# Altium PCB motor_driver.PcbDoc
Units mil, origin at the board's own origin, x right, y up, seen from the top; angles counter-clockwise.
Board outline 1770 x 2225 mil, 2 copper layers (Top Layer, Bottom Layer); 29 components, 17 nets, 107 pads, 63 vias.
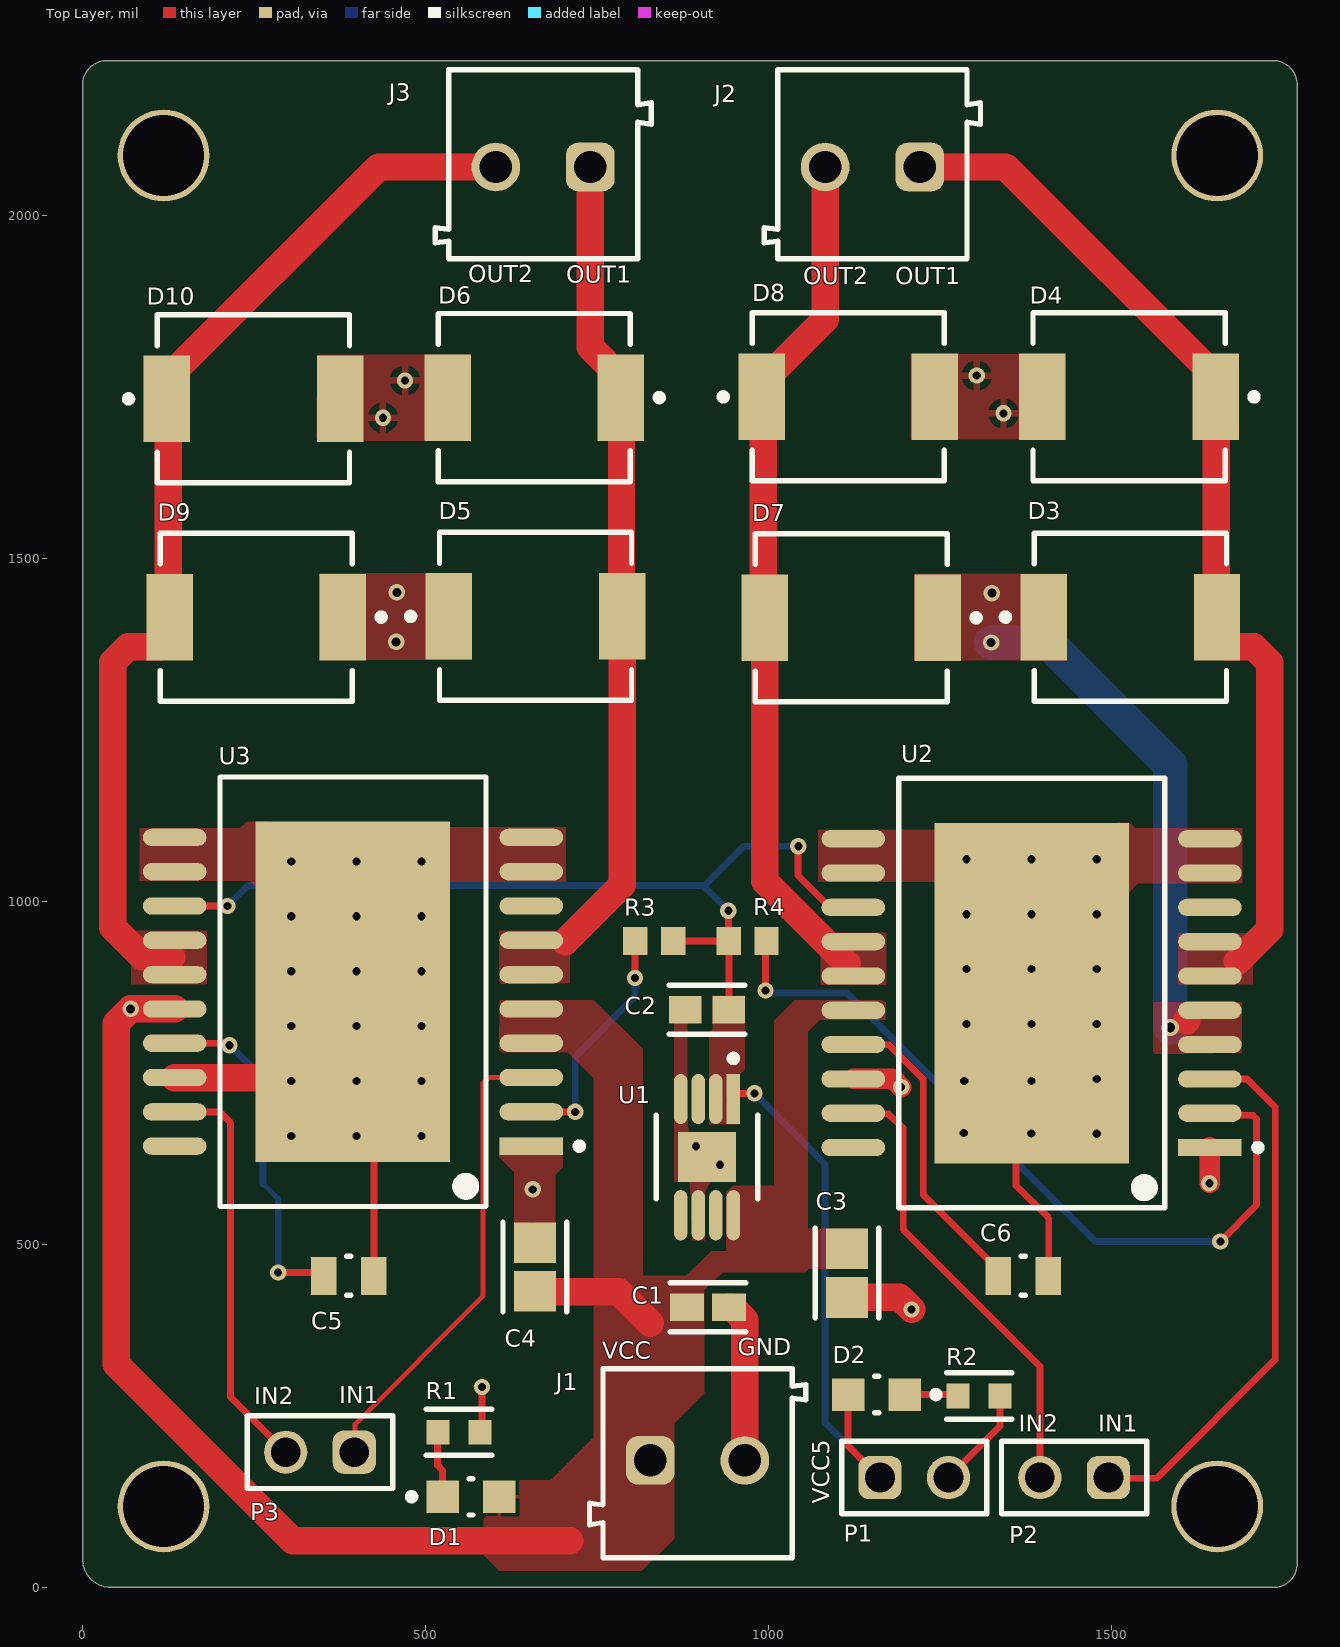
[diagram p0: Top Layer view]
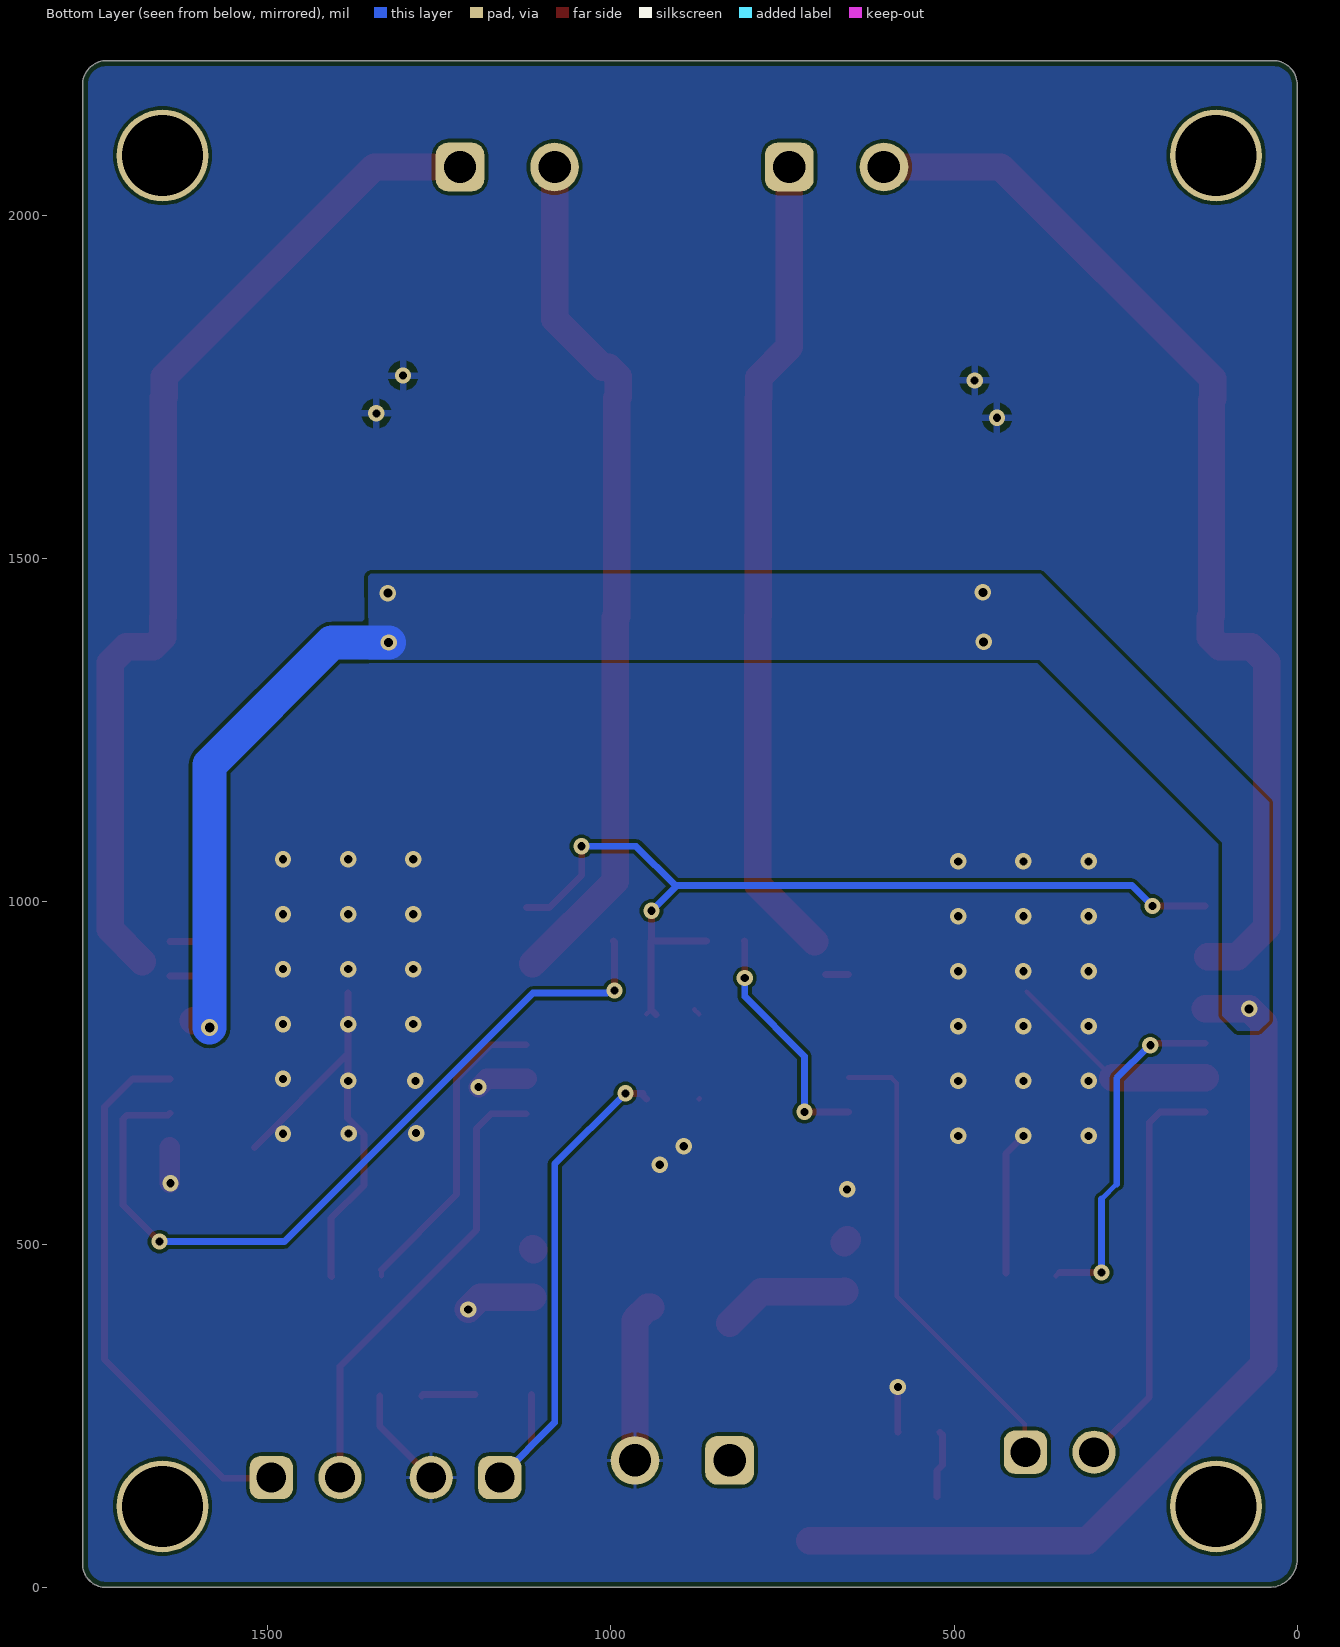
[diagram p1: Bottom Layer view, seen from below]

## Layer stack, top to bottom
Top Solder: solder mask 0.4, Solder Resist, Dk 3.5
Top Layer: signal copper 1.4
Dielectric 1: dielectric 12.6, FR-4, Dk 4.8
Bottom Layer: signal copper 1.4
Bottom Solder: solder mask 0.4, Solder Resist, Dk 3.5

## Board outline
0,41 ccw(c41,41) 41,0 1736,0 ccw(c1736,34) 1770,34 1770,2190 ccw(c1735,2190) 1735,2225 35,2225 ccw(c35,2190) 0,2190

## Design rules (kind name [scope] priority, off if disabled: settings)
BoardOutlineClearance [All] p1: gap=7.87 ignorepadtopadclearanceinfootprint=FALSE
Clearance [All] p1: gap=5 ignorepadtopadclearanceinfootprint=FALSE except(9.84: Arc-Hole Track-Hole SMDPad-Hole THPad-Hole Via-Hole Fill-Hole Poly-Hole Region-Hole Text-Hole)
ComponentClearance [All] p1: gap=5 collisioncheckmode=3 verticalgap=5 showdistances=TRUE
DiffPairsRouting [All] p1: maxlimit=10 minlimit=5 mostfreqgap=5 toplayer_minwidth=5 toplayer_maxwidth=1000 toplayer_prefwidth=5 bottomlayer_minwidth=5 bottomlayer_maxwidth=1000 bottomlayer_prefwidth=5 maxuncoupledlength=500
Height [All] p1: minheight=0 maxheight=71497.94 prefheight=500
HoleSize [All] p1: absolutevalues=TRUE maxlimit=248.03 minlimit=11.81 maxpercent=80.000 minpercent=20.000
HoleToHoleClearance [All] p1: gap=9.84 allowstackedmicrovias=FALSE
MinimumAnnularRing [All] p1: minimumring=3
MinimumSolderMaskSliver [All] p1: minsoldermaskwidth=0
PlaneClearance [All] p1: clearance=5
PlaneConnect PlaneConnectPowerPads [InPadClass('PowerPads')] p1: planeconnectstyle=Direct reliefexpansion=20 reliefentries=4 reliefconductorwidth=10 reliefairgap=10
PlaneConnect [All] p2: pad.planeconnectstyle=Relief pad.reliefexpansion=11.81 pad.reliefentries=4 pad.reliefconductorwidth=5 pad.reliefairgap=5 via.planeconnectstyle=Direct via.reliefexpansion=11.81 via.reliefentries=4 via.reliefconductorwidth=5 via.reliefairgap=5
PolygonConnect PolygonConnectPowerPads [All vs (InPadClass('PowerPads'))] p1: connectstyle=Direct reliefconductorwidth=10 reliefentries=4 polygonreliefangle="90 Angle" airgapwidth=10
PolygonConnect [All] p2: thpad.connectstyle=Relief thpad.reliefconductorwidth=5 thpad.reliefentries=4 thpad.polygonreliefangle="90 Angle" thpad.airgapwidth=5 smdpad.connectstyle=Relief smdpad.reliefconductorwidth=5 smdpad.reliefentries=4 smdpad.polygonreliefangle="90 Angle" smdpad.airgapwidth=5 via.connectstyle=Direct via.reliefconductorwidth=5 via.reliefentries=4 via.polygonreliefangle="90 Angle" via.airgapwidth=5
RoutingVias [All] p1: holewidth=11.81 width=23.62 viastyle="Through Hole" minholewidth=11.81 minwidth=23.62 maxholewidth=23.62 maxwidth=259.84
SilkToSilkClearance [All] p1: silktosilkclearance=0
SilkToSolderMaskClearance [IsPad] p1: minsilkscreentomaskgap=5 clearancetoexposedcopper=TRUE
SolderMaskExpansion [All] p1: expansion=2.95 istentingtop=FALSE
Width [All] p1: maxlimit=1000 minlimit=5 preferedwidth=5 minimp=50.000000 maximp=50.000000 favimp=50.000000
20 further rules are at their usual default settings.

## Classes and differential pairs
component class motor_driver: C1 C2 C3 C4 C5 C6 D7 D9 D10 J1 J2 J3 P1 P2 P3 R1 R2 R3 R4 U1 U2 U3

## Components (designator, comment, footprint, x,y, rotation, side; value= is the part's Value field where it differs from the comment)
C1 "1uF" FP-CC0603-DA-IPC_A 911.41,408 r0 top value="100 nF"
C2 "10uF" FP-GRM188-0_1-e0_2_0_55-IPC_A 910,842 r180 top
C3 "47pF" FP-C0805C-DN-IPC_A 1114,458 r270 top value="47 pF"
C4 "47pF" FP-C0805C-DN-IPC_A 659,467 r90 top value="47 pF"
C5 "33nF" FP-CC0805-0_85-MFG 388,454 r0 top value="33 nF"
C6 "33nF" FP-CC0805-0_85-MFG 1371,454 r0 top value="33 nF"
D1 "HSMH-C170" FP-HSMS-C170-MFG 566,132 r0 top
D2 "HSMH-C170" FP-HSMS-C170-MFG 1157,281 r180 top
D3 "SS34-E3/9AT" FP-SMC-MFG 1527,1414 r0 top
D4 "SS34-E3/9AT" FP-SMC-MFG 1525,1735 r180 top
D5 "SS34-E3/9AT" FP-SMC-MFG 660,1415 r0 top
D6 "SS34-E3/9AT" FP-SMC-MFG 658.32,1734 r180 top
D7 "SS34-E3/9AT" FP-SMC-MFG 1120,1413 r180 top
D8 "SS34-E3/9AT" FP-SMC-MFG 1115.68,1735 r0 top
D9 "SS34-E3/9AT" FP-SMC-MFG 253,1414 r180 top
D10 "SS34-E3/9AT" FP-SMC-MFG 249,1732 r0 top
J1 "POWER" 691103110002 50896.1,50181.06 r0 top
J2 "MOTOR_A" 691103110002 -48848.9,-47926.06 r180 top
J3 "MOTOR_B" 691103110002 -49328.9,-47926.06 r180 top
P1 "61300211121" 61300211121 1212,160 r0 top
P2 "61300211121" 61300211121 1445,160 r180 top
P3 "61300211121" 61300211121 346,197 r180 top
R1 "1k" FP-RC0603-0_55-IPC_B 548.52,226 r0 top
R2 "1k" FP-RC0603-0_55-IPC_B 1306.42,279 r0 top
R3 "10k" RESC1609X50X30ML8T20 833,942 r180 top
R4 "10k" RESC1609X50X30ML8T20 969,942 r0 top
U1 "TLV76750DGNR" FP-DGN0008G-IPC_A 910,627 r270 top
U2 "MC33886VW" FP-SOT397-2-IPC_A 1383,866 r180 top
U3 "MC33886VW" FP-SOT397-2-IPC_A 394,868 r180 top

## Footprints (in the part's own frame and the unit in brackets; to place one, negate y for a bottom-side part, rotate by r counter-clockwise, add the part's x,y. Pads: shape width x height; smd on the part's side, far side on the other; paste and mask are expansions set on the pad)
61300211121 [mm] "Pin Header, pitch 2.54 mm, THT, Vertical, single row, 2p"
  rrect50% 1.6x1.6 hole 1.1: 1(-1.27,0)
  round 1.6 hole 1.1: 2(1.27,0)
  silkscreen extent -2.69,-1.35 2.69,1.35, body extent -2.54,-1.27 2.54,1.27, height 8.57
691103110002 [mm] "3,50mm - modular - blue - Horizontal wire entry - Pressure clamp - 8,4mm height - 02p"
  rrect50% 1.8x1.8 hole 1.2: 1(-1271.75,-1269.9)
  round 1.8 hole 1.2: 2(-1268.25,-1269.9)
  silkscreen extent -1274,-1273.5 -1266,-1266.5, body extent -1274,-1273.5 -1266,-1266.5, height 8.45
FP-C0805C-DN-IPC_A [mil]
  rect 59.24x61.27 smd paste+0 mask+0: 1(-35.46,0) 2(35.46,0)
  silkscreen extent -65,-46 65,46, body extent -85,-50 85,50, height 10
FP-CC0603-DA-IPC_A [mil]
  rect 49.53x39.85 smd paste+0 mask+0: 1(-30.59,0) 2(30.59,0)
  silkscreen extent -55,-36 55,36, body extent -75,-40 75,40, height 10
FP-CC0805-0_85-MFG [mm]
  rect 0.95x1.4 smd paste+0 mask+0: 1(-0.925,0) 2(0.925,0)
  silkscreen extent -0.08,-0.72 0.08,0.72, body extent -1.6,-1.05 1.6,1.05, height 0.25
FP-DGN0008G-IPC_A [mm]
  rect 1.857x0.498 smd paste+0 mask+0: 1(-2.151,0.975)
  rrect100% 1.857x0.498 smd paste+0 mask+0: 2(-2.151,0.325) 3(-2.151,-0.325) 4(-2.151,-0.975) 5(2.151,-0.975) 6(2.151,-0.325) 7(2.151,0.325) 8(2.151,0.975)
  rect 1.846x2.15 smd paste-1000 mask+0: 9(0,0)
  silkscreen extent -3.78,-1.88 1.55,1.88, body extent -3.58,-2 3.58,2, height 0.25
FP-GRM188-0_1-e0_2_0_55-IPC_A [mil]
  rect 47.57x39.85 smd paste+0 mask+0: 1(-31.57,0) 2(31.57,0)
  silkscreen extent -55,-36 55,36, body extent -75,-40 75,40, height 10
FP-HSMS-C170-MFG [mm]
  rect 1.2x1.2 smd paste+0 mask+0: 1(-1.05,0) 2(1.05,0)
  silkscreen extent -2.32,-0.67 0.08,0.67
FP-RC0603-0_55-IPC_B [mil]
  rect 33.81x35.91 smd paste+0 mask+0: 1(-30.58,0) 2(30.58,0)
  silkscreen extent -47,-34 47,34, body extent -57,-28 57,28, height 10
FP-SMC-MFG [mm]
  rect 1.72x3.2 smd paste+0 mask+0: 1(-3.205,0) 2(3.205,0)
  silkscreen extent -4.75,-3.11 3.56,3.11, body extent -4.17,-3.21 4.17,3.21, height 0.25
FP-SOT397-2-IPC_A [mm]
  rect 2.354x0.639 smd paste+0 mask+0: 1(-6.6,5.715)
  rrect100% 2.354x0.639 smd paste+0 mask+0: 2(-6.6,4.445) 3(-6.6,3.175) 4(-6.6,1.905) 5(-6.6,0.635) 6(-6.6,-0.635) 7(-6.6,-1.905) 8(-6.6,-3.175) 9(-6.6,-4.445) 10(-6.6,-5.715) 11(6.6,-5.715) 12(6.6,-4.445) 13(6.6,-3.175) 14(6.6,-1.905) 15(6.6,-0.635) 16(6.6,0.635) 17(6.6,1.905) 18(6.6,3.175) 19(6.6,4.445) 20(6.6,5.715)
  rect 7.2x12.6 smd paste-1000 mask+0: 21(0,0)
  silkscreen extent -8.5,-7.95 4.92,7.95, body extent -8.28,-8.45 8.28,8.45, height 0.25
RESC1609X50X30ML8T20 [mm] "Chip Resistor, 2-Leads, Body 1.65x0.95mm, IPC Low Density"
  rect 0.9x1.05 smd: 1(-0.7,0) 2(0.7,0)
  body extent -0.82,-0.48 0.82,0.48, height 0.5

## Part data
C1: library part CMP-2000-05002-2, "CAP CER 0.1UF 16V X7R 0603", Capacitance="100 nF", Manufacturer=YAGEO, Manufacturer Part Number=CC0603KRX7R7BB104, Package=CC0603-DA, Temperature="-55°C to +125°C", Temperature Characteristic=X7R, Temperature Coefficient=15%, Temperature Range High=+125°C, Temperature Range Low=-55°C, Tolerance=0.1, Voltage="16 V", Automotive=No, Category=Cap, ComponentLink2Description=Datasheet, ComponentLink2URL=http://www.yageo.com/documents/recent/UPY-GPHC_X7R_6.3V-to-50V_18.pdf, Device Class L1="Passive Components", Device Class L2=Capacitors, Device Class L3="Ceramic Capacitors", Digikey Description="CAP CER 0.1UF 16V X7R 0603", Footprint Url=http://www.yageo.com/exep/pages/download/literatures/UPY-C_GEN_24.pdf, Height=0.9mm, Lead Free=Yes, Material=Ceramic, Mouser Description="Multilayer Ceramic Capacitor, CC Series, 0.1 - F, - 10%, X7R, 16 V, 0603 [1608 Metric]", Octopart=https://octopart.com/cc0603krx7r7bb104-yageo-192941, RoHS=TRUE, Voltage Rating="16 V"
C2: library part CMP-2006-02792-2, "Chip Multilayer Ceramic Capacitors for General Purpose, 0603, 10uF, X5R, 15%, 20%, 6.3V", Case Code (Imperial)=0603, Case Code (Metric)=1608, Dielectric=X5R, Max Operating Temperature=85°C, Min Operating Temperature=-55°C, Package Quantity=4000, Tolerance=20%, Voltage=6.3V, Capacitance=10uF, Case/Package=0603, Depth=0.8mm, Height=0.8mm, Lead Free="Lead Free", Length=1.6mm, Material=Ceramic, Mount="Surface Mount", Packaging="Tape and Reel", Radiation Hardening=No, REACH SVHC="No SVHC", Termination=SMD/SMT, Thickness=0.035inch, Voltage Rating=6.3V, Voltage Rating (DC)=6.3V, Width=0.031inch
C3 C4: library part CMP-1036-01631-3, "CAP CER 47PF 100V 5% NP0 0805", Capacitance="47 pF", Manufacturer=KEMET, Manufacturer Part Number=C0805C470J1GACTU, Package=C0805C-DN, Temperature="-55°C to +125°C", Temperature Characteristic=C0G, Temperature Coefficient=30ppm/°C, Temperature Range High=+125°C, Temperature Range Low=-55°C, Tolerance=0.05, Voltage Rating="100 V", Automotive=No, Category=Cap, ComponentLink2Description=Datasheet, ComponentLink2URL=https://content.kemet.com/datasheets/KEM_C1003_C0G_SMD.pdf, Device Class L1="Passive Components", Device Class L2=Capacitors, Device Class L3="Ceramic Capacitors", Digikey Description="CAP CER 47PF 100V 5% NP0 0805", Height=0.88mm, Ipc Land Pattern Name=CAPC200125X78, Lead Free=Yes, Material=Ceramic, Mouser Description="Capacitor: ceramic; MLCC; 47pF; 100V; C0G; ±5%; SMD; 0805", Octopart=https://octopart.com/c0805c470j1gactu-kemet-9138638, RoHS=TRUE
C5 C6: library part CMP-03422-000605-1, "CAP CER 0.033UF 25V X7R 0805", Capacitance="33 nF", Manufacturer=Yageo, Manufacturer Part Number=CC0805KRX7R8BB333, Package=CC0805-0.85, Temperature="-30°C to +85°C", Temperature Characteristic=X7R, Temperature Range High=+85°C, Temperature Range Low=-30°C, Tolerance=0.1, Voltage Rating="25 V", Automotive=No, Category=Cap, ComponentLink2Description=Datasheet, ComponentLink2URL=http://www.yageo.com/documents/recent/UPY-GPHC_Y5V_6.3V-to-50V_8.pdf, Device Class L1="Passive Components", Device Class L2=Capacitors, Device Class L3="Ceramic Capacitors", Digikey Description="CAP CER 0.033UF 25V X7R 0805", Footprint Url=http://www.yageo.com/exep/pages/download/literatures/UPY-C_GEN_24.pdf, Height=0.95mm, Ipc Land Pattern Name=CAPC200125X85, Lead Free=Yes, Material=Ceramic, Mouser Description="Multilayer Ceramic Capacitors MLCC - SMD/SMT 33nF 25V X7R 10%", Octopart=https://octopart.com/cc0805krx7r8bb333-yageo-42623524, RoHS=TRUE
D1 D2: library part CMP-18399-000018-1, "LED RED DIFFUSED CHIP SMD", Case Code (Imperial)=0805, Case Code (Metric)=2012, Color=Red, Forward Current=20mA, Forward Voltage=2.1V, Lens Color=White, Max Operating Temperature=85°C, Min Operating Temperature=-40°C, Package Quantity=1, Power Dissipation=52mW, Reverse Voltage=5V, Case/Package=0805, Depth=1.25mm, Dominant Wavelength=626nm, Height=0.8mm, Illumination Color=Red, Lead Free="Lead Free", Length=2mm, Lens Style=Diffused, Lens Transparency=Diffused, Luminous Intensity=10mcd, Mount="Surface Mount", Number of Elements=1, Number of LEDs=1, Number of Pins=2, Number of Terminals=2, Packaging="Tape and Reel", Power Rating=52mW, Radiation Hardening=No, REACH SVHC="No SVHC", Shape=Rectangular, Test Current=20mA, Viewing Angle=170°, Wavelength=626nm, Width=1.25mm
D3 D4 D5 D6 D7 D8 D9 D10: library part CMP-02539-000066-1, "DIODE SCHOTTKY 40V 3A DO214AB", Average Rectified Current=3A, Case/Package=SMC, Forward Voltage=500mV, Max Operating Temperature=125°C, Max Repetitive Reverse Voltage (Vrrm)=40V, Max Reverse Current=500uA, Max Surge Current=100A, Min Operating Temperature=-55°C, Package Quantity=3500, Element Configuration=Single, Forward Current=3A, Max Reverse Leakage Current=500uA, Max Reverse Voltage (DC)=40V, Mount="Surface Mount", Number of Pins=2, Packaging="Tape and Reel", Peak Non-Repetitive Surge Current=100A, Radiation Hardening=No, RoHS Compliant=Yes, Series=-
J1 J2 J3: library part CMP-1502-03254-2, Color=Blue, Current=10A, Max Operating Temperature=105°C, Min Operating Temperature=-40°C, Voltage=125V, Contact Material="Brass, Copper, Nickel, Tin, Zinc", Contact Plating=Tin, Current Rating=10A, Height=8.5mm, Housing Material=Nylon, Lead Pitch=3.5mm, Length=7mm, Mount="Through Hole", NexarPartId=18818286, Number of Contacts=2, Number of Levels=1, Number of Pins=2, Number of Positions Per Level=2, Number of Rows=1, Packaging=Box, Pitch=3.5052mm, Plating=Steel, REACH SVHC=Unknown, RoHS=Compliant, Stripping Length=-6mm, Termination=Screw, Voltage Rating=125V, Width=8mm, Wire Gauge (Max)=26AWG, Wire Gauge (Min)=16AWG, Wire/Cable Gauge=26AWG
P1 P2 P3: library part CMP-1712-00002-5, Color=Black, Contact Resistance=20mΩ, Current Rating=3A, Max Operating Temperature=125°C, Min Operating Temperature=-40°C, Operating Supply Voltage=250V, Connector Type="Male Pin", Contact Gender=Male, Contact Material=Copper, Contact Mating Length=5.9944mm, Contact Plating=Gold, Gender=Male, Height=8.94mm, Housing Material=PBT, Lead Free="Lead Free", Lead Pitch=2.54mm, Mount="Through Hole", NexarPartId=20081794, Number of Contacts=2, Number of Pins=2, Number of Positions=2, Number of Rows=1, Orientation=Vertical, Packaging=Bulk, Pitch=2.54mm, REACH SVHC="No SVHC", RoHS=Compliant, Termination="Through Hole", Voltage Rating=250V
R1 R2: library part CMP-1659-00009-5, "RES 1K OHM 1% 1/10W 0603", Case Code (Imperial)=0603, Case Code (Metric)=1608, Max Operating Temperature=155°C, Max Power Dissipation=100mW, Min Operating Temperature=-55°C, Resistance=1kR, Resistance Tolerance=1%, Resistor Type="Thick Film", Temperature Coefficient=100ppm/°C, Voltage Rating=50V, Case/Package=0603, Construction=Rectangular, Contact Plating=Tin, Depth=0.8mm, Features="Moisture Resistant", Height=0.45mm, Lead Free="Lead Free", Length=1.6mm, Military Standard=Not, Number of Terminations=2, Packaging="Tape and Reel", Power Rating=100mW, Radiation Hardening=No, REACH SVHC="No SVHC", RoHS Compliant=Yes, Series=RC, Size Code=0603, Technology="THICK FILM", Termination=SMD/SMT, Tolerance=1%
R3 R4: library part CMP-1666-00005-4, "Chip Resistor, 10 KOhm, +/- 1%, 100 mW, -55 to 155 degC, 0603 (1608 Metric), RoHS, Tape and Reel", Manufacturer="Vishay Semiconductor", Max Operating Temperature="155 degC", Min Operating Temperature="-55 degC", Package Quantity=5000, Voltage Rating="75 V", ComponentLink1Description="Manufacturer URL", ComponentLink1URL=http://www.vishay.com/, ComponentLink2Description=Datasheet, ComponentLink2URL=https://datasheet.ciiva.com/11809/0900766b80d98afc-11809037.pdf, DatasheetVersion=06/2012, Height="0.45 mm", Length="1.55 mm", Mounting Technology="Surface Mount", PackageDescription="2-Pin Surface Mount Device, Body 1.575 x 0.85 mm", PackageReference=0603, Packaging="Tape and Reel", REACH SVHC=Unknown, RoHSCompliant=true
U1: library part CMP-00370-110083557-1, "TLV76701DGNR Adjustable- and fixed-output, 1-A, 16-V, positive-voltage low-dropout (LDO) linear regulator 8-HVSSOP -40 to 125", Dropout Voltage=900mV, Manufacturer Lifecycle Status=ACTIVE, Max Junction Temperature (Tj)=125°C, Max Supply Voltage=16V, Min Operating Temperature=-40°C, Min Supply Voltage=2.5V, Nominal Supply Current=1.5mA, Output Current=1A, Accuracy=0.5%, Height=1.1mm, Length=3mm, Lifecycle Status=Production, Max Operating Temperature=125°C, NexarPartId=110083557, Number of Channels=1, Number of Outputs=1, Number of Pins=8, Thickness=1.02mm, Width=3mm
U2 U3: library part CMP-10141-000005-1, "Motor Driver CMOS Parallel 20-HSOP", Case/Package=HSOP, Max Input Voltage=7V, Max Operating Temperature=125°C, Max Output Current=5A, Max Supply Voltage=40V, Min Operating Temperature=-40°C, Min Supply Voltage=5V, Nominal Supply Current=20mA, Package Quantity=30, Interface=Parallel, Logic Function="AND GATE", Mount="Surface Mount", Number of Outputs=2, Number of Pins=20, Output Current=5A, Output Voltage=40V, Packaging=Rail/Tube, REACH SVHC="No SVHC", RoHS Compliant=Yes, Series=-, Supply Current=20mA, Technology=CMOS, Termination=SMD/SMT, Weight=0.078135oz

## Free pads (board coordinates)
  round 133.86 hole 118.11: 2(118.11,2086.61) 3(1653.54,2086.61) 4(118.11,118.11) 5(1653.54,118.11)

## Via types
v1: diameter 24, hole 12, Top Layer to Bottom Layer, 38 vias
v2: diameter 23.62, hole 11.81, Top Layer to Bottom Layer, 18 vias
v3: diameter 24, hole 13, Top Layer to Bottom Layer, 5 vias
v4: diameter 25, hole 14, Top Layer to Bottom Layer, 1 vias
v5: diameter 24.02, hole 12, Top Layer to Bottom Layer, 1 vias

## Nets (pads, with @x,y where several pads share a name; then routed paths per layer and width w, separated by ;. In a path a pad name is that pad's centre, name@x,y a point inside that pad or via, vN(x,y) a via of type N, cw(c..) or ccw(c..) an arc to the next point about the centre after c; other vN are vias at no path point)
GND: C1.2 C2.2 C3.2 C4.2 C5.2 C6.2 D4.2 D6.2 D8.2 D10.2 J1.2 P1.2 R1.2 R2.2 U1.4 U1.6 U1.9 U2.1 U2.9 U2.10 U2.11 U2.12 U2.18 U2.21 U3.1 U3.9 U3.10 U3.11 U3.12 U3.18 U3.21 | length 1857.7
  Top Layer w7: U3.21@269,743 U3.21 ; U1.4@871,712.29 U1.4 ; C2.2@871.61,835.18 C2.2
  Top Layer w10: v1(399,658) 424.46,632.54 C5.2@424.46,458 ; R1.2@581.53,226 582,226.47 v2(582,292) ; P1.2 1337,235 R2.2 ; U2.21 1383,823 1386,820 1383,817 U2.21@1383,777.73 ; C6.2@1407,453 1408,454 1408,538 1360,586 1360,660 1384,684 1384,748 1383,749 U2.21@1383,777.73 ; U2.21@1519.73,641 U2.21@1383,777.73 ; v2(1642,589) v2@1642.85,589.85
  Top Layer w30: U2.18 1180.9,741 v2(1192.89,729.01) ; v2@1642.85,589.85 U2.1
  Top Layer w40: U3.18 U3.21@269,743 ; C4.2@656,506.48 C4.2@660.02,502.46 ; C1.2 946.69,408 965,389.69 J1.2 ; C3.2 1190.46,422.54 v2(1208,405)
  other v1: 656,580 929,616 894,643 304,658 494,658 1382.44,661.44 1478,661 1284,662 304,738 399,738 494,738 1285,738 1383,738 1478,741 304,818 399,818 494,818 1383,821.01 1478,821 304,898 399,898 494,898 1288,901 1383,901 1478,901 304,978 399,978 494,978 1288,981 1383,981 1478,981 304,1058 399,1058 494,1058 1288,1061 1383,1061 1478,1061
  other v2: 437.65,1704.51 1342,1711 470,1759 1303,1766
  other v5: 1288,821
NetC5_1: C5.1 U3.17 | length 510.7
  Top Layer w7: C5.1@346.58,459 C5.1
  Top Layer w10: U3.17 211,793 v2(214,790) ; v2(285,459) C5.1@346.58,459
  Bottom Layer w7: v2(214,790) v2@215,790 ; 263,588 285,566
  Bottom Layer w10: v2@215,790 263,742 263,588 ; v2(285,459) 285,566
NetC6_1: C6.1 U2.17 | length 455
  Top Layer w7: U2.17 U2.17@1123.43,790.72 ; C6.1 C6.1@1334.58,462.86
  Top Layer w10: U2.17@1123.43,790.72 1175.28,790.72 1225,741 1225,572.44 C6.1@1334.58,462.86
NetD1_1: D1.1 R1.1 | length 98.6
  Top Layer w10: R1.1@520.38,226 517,222.62 517,178 524.66,170.34 D1.1
NetD2_1: D2.1 R2.1 | length 78.3
  Top Layer w10: D2.1 1273.84,281 R2.1
NetD3_2: D3.2 D4.1 J2.1 U2.6 U2.7 | length 1552.8
  Top Layer w10: U2.6@1609.09,891 U2.6 ; U2.7@1609.09,941 U2.7
  Top Layer w40: J2.1 1345.31,2070 1651.18,1764.13 D4.1 1652.18,1734 1652.18,1415 D3.2 1653.18,1384.87 1667.04,1371.01 1706.57,1371.01 1730,1347.58 1730,959 1683,912
NetD5_2: D5.2 D6.1 J3.1 U3.6 U3.7 | length 1216.2
  Top Layer w10: U3.6 U3.6@687.62,893
  Top Layer w40: 703.1,941.1 786.18,1024.18 D5.2 785.34,1415.84 785.34,1733.16 D6.1 784.5,1763.13 740,1807.64 J3.1
NetD7_2: D7.2 D8.1 J2.2 U2.14 U2.15 | length 1256.6
  Top Layer w40: J2.2 1082.2,1848.2 1011.99,1777.99 1003.35,1777.99 989.49,1764.13 D8.1 991.66,1732.84 991.66,1415.16 D7.2 993.82,1029.18 1114.41,908.59
NetD9_2: D9.2 D10.1 J3.2 U3.14 U3.15 | length 1573.3
  Top Layer w40: 130,919 87,919 44,962 44,1348.25 66.76,1371.01 112.96,1371.01 126.82,1384.87 D9.2 124.82,1416 124.82,1730 D10.1 122.82,1761.13 431.68,2070 J3.2
NetP2_1: P2.1 U2.3 | length 794.8
  Top Layer w10: P2.1@1495,159 1565,159 1738,332 1738,700 1697,741 U2.3
NetP2_2: P2.2 U2.19 | length 692.4
  Top Layer w7: U2.19 U2.19@1123.93,690.22
  Top Layer w10: U2.19@1123.93,690.22 1174.78,690.22 1196,669 1196,521.17 1395,322.17 P2.2
  Bottom Layer w10: P2.2 P2.2@1395,179
NetP3_1: P3.1 U3.3 | length 689
  Top Layer w7: P3.1@397,197 397,238 583.41,424.41 583.41,735 591.41,743 U3.3
NetP3_2: P3.2 U3.19 | length 602.3
  Top Layer w10: U3.19@134.65,692.5 U3.19 200,693 215.5,677.5 215.5,277.5 P3.2
NetR3_2: R3.2 U3.2 | length 349.4
  Top Layer w10: U3.2 v2(718,693) ; v2(805,888) 805,941.56 R3.2
  Bottom Layer w10: v2(718,693) 718,774 805,861 v2(805,888)
NetR4_2: R4.2 U2.2 | length 1159.2
  Top Layer w10: v2(995,870) 995,940.44 R4.2 ; U2.2 1645.75,688.1 1705.14,688.1 1711,682.24 1711,557 v2(1658,504)
  Bottom Layer w10: v2(995,870) 997.61,867.39 1004.29,867.39 1005.69,866 1114,866 1476,504 v2(1658,504)
VCC: C1.1 C3.1 C4.1 D1.2 D3.1 D5.1 D7.1 D9.1 J1.1 U1.8 U2.4 U2.5 U2.16 U3.4 U3.5 U3.16 | length 2265.7
  Top Layer w40: U3.16 v3(70,843) 49,822 49,325 306,68 710.2,68 ; C4.1 659.54,431 781,431 827.2,384.8 ; C3.1@1112.72,492.18 C3.1 ; 1609.09,826.09 1609.09,826.17
  Bottom Layer w50: v3(1324,1377) 1407,1377 1585,1199 v4(1585,816)
  other v3: 457,1378 1325,1449 458,1450
VCC5: C2.1 D2.2 P1.1 R3.1 R4.1 U1.1 U1.2 U2.13 U3.13 | length 2196.6
  Top Layer w7: C2.1 C2.1@948.39,835.18
  Top Layer w10: U3.13 v2(211,993) ; R3.1 R4.1 ; C2.1@934,834.43 C2.1 941.85,842.28 941.85,942 R4.1 ; v2(941,986) 941,942.44 R4.1 ; U1.1 953.19,716.48 953.19,720 v2(979,720) ; v2(1043,1080) 1042.61,1079.61 1042.61,1037.78 1089.38,991 U2.13 ; D2.2 1115.66,206.34 P1.1
  Bottom Layer w10: v2(211,993) 240.89,1022.89 906.14,1022.89 ; v2(941,986) 906.14,1020.86 906.14,1022.89 ; v2(979,720) 1082,617 1082,240 P1.1 ; v2(1043,1080) 963.26,1080 906.14,1022.89
pads on no net: U1.3 U1.5 U1.7 U2.8 U2.20 U3.8 U3.20

## Polygon pours and split planes (outlines as drawn)
VCC on Top Layer "Top Layer-VCC" (solid, pour order 36): 933.13,459 1053,459 1057,463 1057,464 1144,464 1144,523 1057,523 1057,810 1074,827 1170.5,827 1170.5,856 1167,856 1038,856 1008,826 1008,585 948,585 938,575 938,490 916,490 880,454 816,454 816,785 745,856 608,856 606.97,780 707,780 745,742 745,219 682,156 584,156 585,46 607,24 815,24 862,71 862,239 906,283 906,389 906,434.04
VCC on Top Layer "VCC_L01_P029" (solid, pour order 29): 1212,1476 1213,1477 1434,1477 1434,1351 1212,1351
VCC on Top Layer "VCC_L01_P028" (solid, pour order 28): 345,1477 346,1478 567,1478 567,1352 345,1352
GND on Top Layer "GND_L01_P027" (solid, pour order 27): 1207,1797 1431,1798 1432,1798 1432,1673 1207,1673
GND on Top Layer "GND_L01_P026" (solid, pour order 26): 342,1795 343,1796 564,1796 564,1673 562,1671 341,1671
GND on Top Layer "GND_L01_P034" (solid, pour order 34): 629,475 629,605 607,627 607,656 700,656 700,612 689,601 689,475
VCC5 on Top Layer "VCC5_L01_P030" (solid, pour order 30): 958,675 913,675 913,808 918,813 918,862 965,862 965,755 958,748
GND on Top Layer "GND_L01_P003" (solid, pour order 3): 1072,1028 1255,1028 1255,1104 1218,1104 1072,1104
GND on Top Layer "GND_L01_P000" (solid, pour order 0): 527,1108 704,1108 704,1028 527,1028
NetD7_2 on Top Layer "NETD7_2_L01_P017" (solid, pour order 17): 1171,954 1171,877 1170,878 1076,878 1076,952 1076,954
GND on Top Layer "Top Layer-GND" (solid, pour order 15): 888.07,506 907,506 907,576 916,594 916,656 911,661 910,660 882.8,660 881.45,702.22 881.45,827 862,827 862,591 885,591
VCC on Top Layer "VCC_L01_P025" (solid, pour order 25): 1689,779.04 1689,853 1560,853 1560,777.21
NetD5_2 on Top Layer "NETD5_2_L01_P016" (solid, pour order 16): 607,879 607,957 710,957 710,880.2
GND on Top Layer "GND_L01_P001" (solid, pour order 1): 83,1030 243,1030 255,1018 271,1018 271,1116 239,1116 229,1106 83,1106
GND on Top Layer "GND_L01_P002" (solid, pour order 2): 1508,1114 1526,1114 1534,1106 1690,1106 1690,1026 1538,1026 1523,1011 1508,1026
NetD9_2 on Top Layer "NETD9_2_L01_P008" (solid, pour order 8): 181,957 181,879 71,879 71,956 71,957
NetD3_2 on Top Layer "NETD3_2_L01_P009" (solid, pour order 9): 1597,879 1597,953 1705,953 1705,879
GND on Bottom Layer "GND_L02_P019" (solid, pour order 19): 0,2225 1770,2225 1769,2224 1769,0 -1,0
VCC on Bottom Layer "VCC_L02_P031" (solid, pour order 31): 1354,1477 374,1477 41,1144 41,826 56,811 87,811 109,833 109,1085 376,1352 1353,1352

## Silkscreen, mask and mechanical layers (free items; w line width, h text height)
Top Overlay:
  text "OUT2" at 562,1902 h25
  text "OUT1" at 705,1901 h25
  text "OUT2" at 1050,1899 h25
  text "OUT1" at 1184,1899 h25
  text "GND" at 955,338 h25
  text "VCC" at 757,333 h25
  text "IN1" at 374,268 h25
  text "IN2" at 250,267 h25
  text "IN2" at 1364,227 h25
  text "IN1" at 1480,227 h25
  text "VCC5" at 1088,122 h25 r90